# Altium PCB MICROPRESSURE.PcbDoc (part 2 of 2)
Units mm, origin at the board's own origin, x right, y up, seen from the top; angles counter-clockwise.
Board outline 57.02 x 83.19 mm, 2 copper layers (Top Layer, Bottom Layer); 104 components, 45 nets, 269 pads, 428 vias.
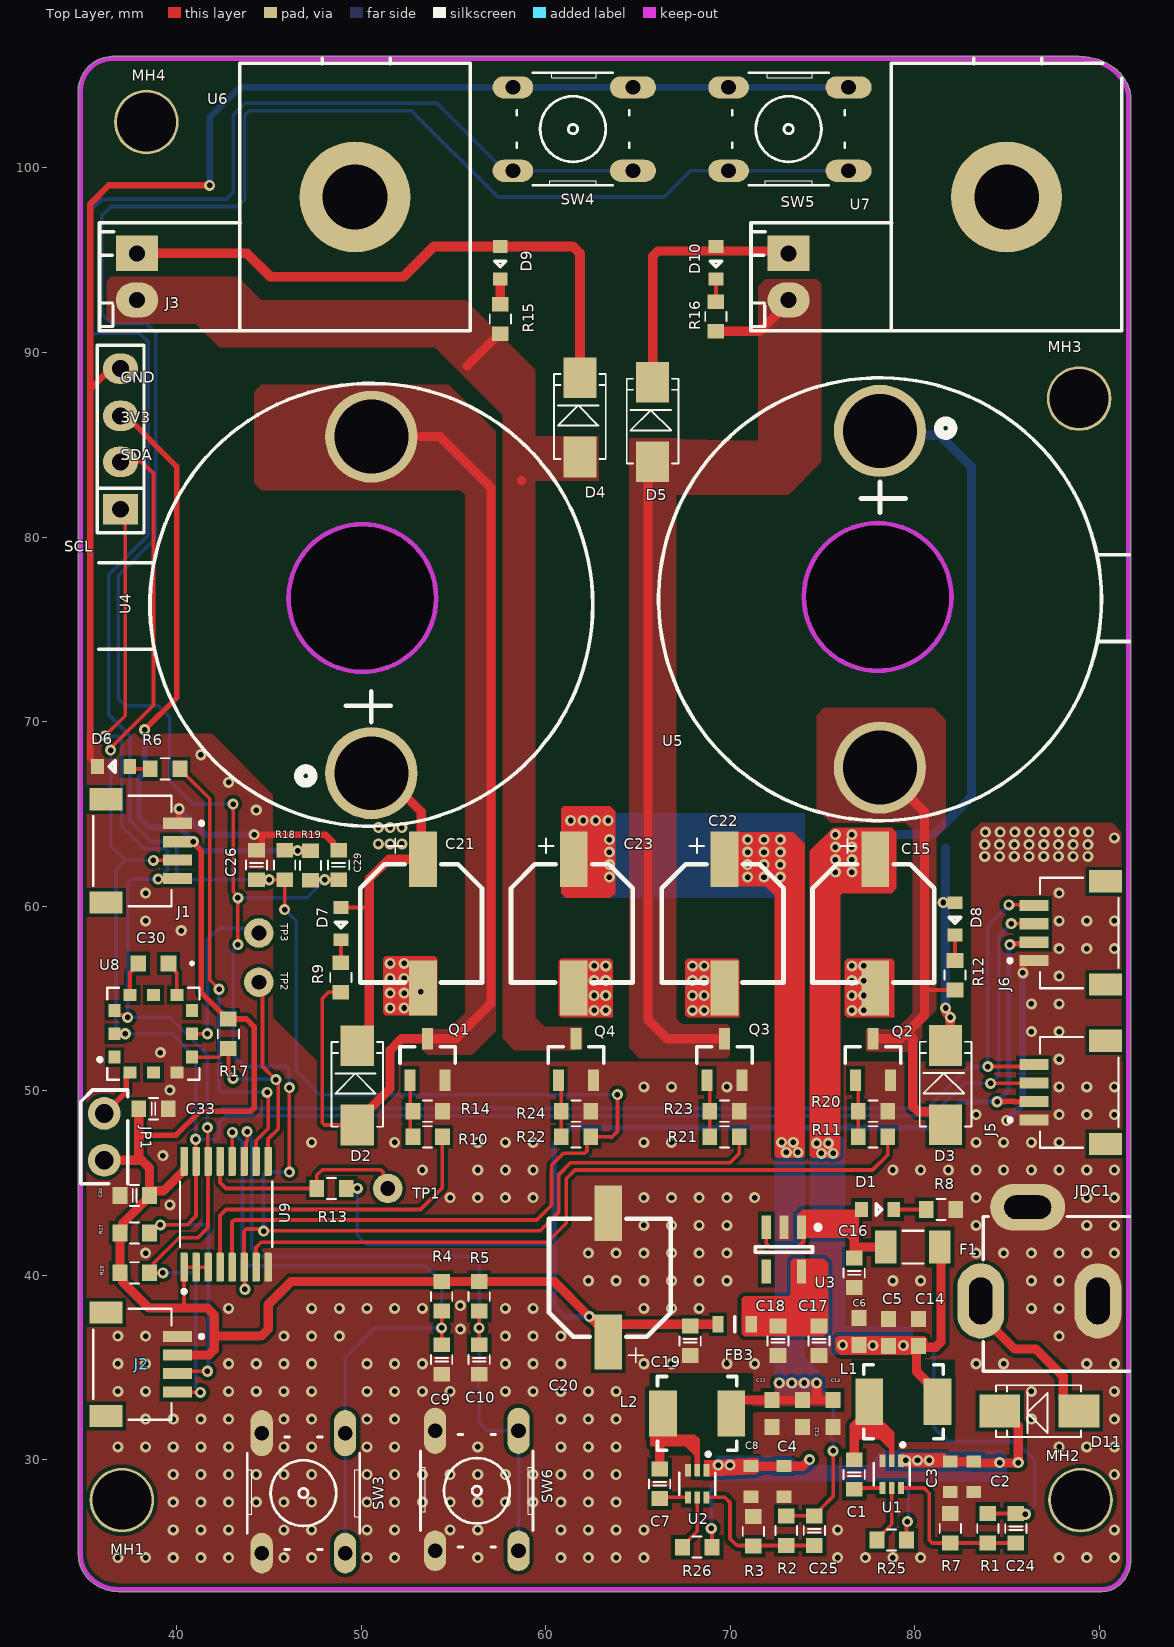
[diagram p0: Top Layer view]

## Via types
v1: diameter 0.6, hole 0.3, Top Layer to Bottom Layer, tented both sides, 428 vias

## Nets (pads, with @x,y where several pads share a name; then routed paths per layer and width w, separated by ;. In a path a pad name is that pad's centre, name@x,y a point inside that pad or via, vN(x,y) a via of type N, cw(c..) or ccw(c..) an arc to the next point about the centre after c; other vN are vias at no path point) (continued)
SW1: (continued)
  Bottom Layer w0.2: v1(43.016,47.747) 43.016,47.737 43.561,47.192 43.561,40.884 43.932,40.513 53.467,40.513 54.356,39.624 v1(54.356,37.148) 50.736,37.148 49.124,35.535 SW3.1 SW3.2
SW2: C10.2 R5.1 SW6.1 SW6.2 U9.11 | length 40.1
  Top Layer w0.2: U9.11 43.752,46.282 43.752,47.216 43.815,47.279 v1(43.815,47.787) ; C10.2 v1(56.388,37.148) R5.1
  Bottom Layer w0.2: v1(43.815,47.787) 43.815,47.679 44.069,47.425 44.069,41.402 44.45,41.021 56.007,41.021 56.388,40.64 v1(56.388,37.148) 56.388,32.004 56.82,31.572 SW6.1 SW6.2
VIN: C2.2 C3.2 C4.2 C8.2 D11.2 R25.2 R26.2 U1.1 U2.1 | length 29
  Top Layer w0.2: v1(68.961,26.289) 68.999,26.251 R26.2 ; R25.2 79.54,26.632 79.502,26.67 79.568,26.67 v1(79.584,26.653)
  Top Layer w0.5: v1(69.977,29.718) 70.004,29.718 70.042,29.756 C8.2@71.12,29.756 ; C8.2 72.699,29.657 72.748,29.706 C4.2@72.898,29.706 ; C4.2 73.915,29.657 74.268,30.01 v1(74.295,30.01) ; v1@80.799,29.972 81.28,29.972 81.349,29.903 81.641,29.903 81.655,29.917 81.671,29.9 82.931,29.9 83.006,29.826 v1@84.563,29.826 ; v1(84.582,29.845) v1@84.563,29.826 ; D11.2 84.793,32.639 85.598,31.834 v1(85.598,29.845) 85.579,29.826 v1@84.563,29.826
  Bottom Layer w0.2: v1(68.961,26.289) 68.961,28.575 69.469,29.083 69.622,29.083 69.942,29.403 69.942,29.683 v1(69.977,29.718) ; 77.47,29.21 78.359,30.099 78.813,30.099 78.902,30.01 79.464,30.01 79.506,29.968 79.51,29.972 v1(80.137,29.972) v1(80.772,29.972) 80.835,29.909 84.519,29.909 v1(84.582,29.845) ; v1(79.584,26.653) 79.629,26.698 79.629,29.21
  other v1: 69.342,29.718 79.502,29.972
pads on no net: J1.S1 J1.S2 J2.S1 J2.S2 J5.S1 J5.S2 J6.S1 J6.S2 MH1.1 MH2.1 MH3.1 MH4.1 U3.4 U6.3 U7.3 U8.1 U8.5 U8.7 U8.11

## Polygon pours and split planes (outlines as drawn)
GND on Bottom Layer "GND_L02_P000" (solid, remove dead copper, pour order 0): 90.297,0.254 91.567,1.524 91.567,57.404 46.101,57.404 45.339,58.166 45.339,66.04 42.164,69.215 30.988,69.215 30.988,1.524 32.131,0.381 33.528,0.381
6V on Bottom Layer "6V_L02_P048" (solid, pour order 48): 70.104,93.853 70.485,94.234 75.057,94.234 75.311,94.488 75.311,96.774 75.057,97.028 68.199,97.028 67.691,96.52 67.691,94.234
6V on Bottom Layer "6V_L02_P046" (solid, pour order 46): 42.037,91.821 41.783,92.075 41.783,94.107 41.656,94.234 36.703,94.234 36.49,94.447 36.49,96.942 36.576,97.028 42.926,97.028 43.307,96.647 43.307,94.742 43.688,94.361 45.72,94.361 45.72,91.948 45.593,91.821
6V on Bottom Layer "6V_L02_P045" (solid, pour order 45): 67.691,91.313 67.691,64.643 67.945,64.389 68.072,64.516 70.104,64.516 70.104,93.853 69.469,94.488 67.691,94.488
6V on Bottom Layer "6V_L02_P044" (solid, pour order 44): 61.468,60.579 57.15,60.579 56.515,61.214 56.515,91.186 55.88,91.821 45.212,91.821 44.958,92.075 44.958,93.98 45.339,94.361 57.531,94.361 58.42,93.472 58.42,65.405 58.928,64.897 61.468,64.897
4V5 on Bottom Layer "4V5_L02_P041" (solid, pour order 41): 74.676,61.849 74.676,60.071 74.422,59.817 55.372,59.817 54.864,60.325 54.864,69.596 54.102,70.358 46.736,70.358 46.228,69.85 46.228,65.024 46.609,64.643 50.165,64.643 50.546,64.262 50.546,59.055 51.562,58.039 77.089,58.039 79.629,60.579 79.629,61.436
4V5 on Bottom Layer "4V5_L02_P040" (solid, pour order 40): 74.676,61.849 74.676,61.214 74.93,60.96 81.534,60.96 82.526,61.952 82.526,64.238 84.709,66.421 84.709,86.995 83.185,88.519 75.311,88.519 75.057,88.265 75.057,83.312 75.565,82.804 81.28,82.804 82.423,81.661 82.423,66.167 80.899,64.643 74.986,64.643 74.709,64.365
GND on Bottom Layer "GND_L02_P035" (solid, pour order 35): 82.169,57.15 82.169,63.627 83.312,64.77 90.424,64.77 91.313,63.881 91.313,57.023
4V5 on Bottom Layer "4V5_L02_P032" (solid, pour order 32): 51.435,65.405 50.927,64.897 50.927,59.055 81.915,59.055 81.915,64.008 74.93,64.008 74.93,59.309 58.42,59.309 57.912,59.817 57.912,64.643 57.15,65.405 55.118,65.405
GND on Top Layer "GND_L01_P001" (solid, remove dead copper, pour order 1): 90.28,0.253 91.55,1.523 91.55,51.562 47.625,51.562 45.212,53.975 45.212,66.04 41.91,69.342 30.971,69.342 30.971,1.523 32.114,0.38 33.511,0.38
6V on Top Layer "6V_L01_P053" (solid, pour order 53): 70.866,31.242 70.866,32.893 75.311,32.893 75.946,32.893 75.946,33.655 75.143,34.417 71.737,34.417 71.102,33.782 69.215,33.782 69.215,31.242
GND on Top Layer "GND_L01_P036" (solid, pour order 36): 82.677,50.8 83.058,51.181 83.058,64.008 83.566,64.516 90.678,64.516 91.186,64.008 91.186,51.193
NetD4_1 on Top Layer "NETD4_1_L01_P055" (solid, pour order 55): 62.865,85.471 58.547,85.471 58.547,83.312 58.674,83.058 62.865,83.058
NetD5_1 on Top Layer "NETD5_1_L01_P050" (solid, pour order 50): 64.516,85.344 71.501,85.217 71.501,93.599 71.882,93.98 74.676,93.98 74.93,93.726 74.93,84.074 73.152,82.296 64.516,82.296
NetD4_1 on Top Layer "NETD4_1_L01_P047" (solid, pour order 47): 44.577,90.297 42.291,90.297 41.402,91.186 41.021,91.567 36.449,91.567 36.195,91.821 36.195,93.853 36.449,94.107 43.307,94.107 44.577,92.837
NetD5_1 on Top Layer "NETD5_1_L01_P042" (solid, pour order 42): 69.977,53.467 69.977,51.943 69.723,51.689 65.151,51.689 64.516,52.324 64.516,84.328 64.516,85.344 67.056,85.344 67.056,84.201 67.056,53.908 67.358,53.606 69.838,53.606
NetD3_1 on Top Layer "NETD3_1_L01_P039" (solid, pour order 39): 77.343,53.34 78.994,53.34 79.883,54.229 79.883,64.135 79.502,64.516 75.438,64.516 74.676,65.278 74.676,70.358 75.057,70.739 81.026,70.739 81.661,70.104 81.661,64.262 81.153,63.754 81.153,54.356 80.391,53.594 80.391,52.881 79.619,52.109 77.431,52.109 77.343,52.197
NetD4_1 on Top Layer "NETD4_1_L01_P038" (solid, pour order 38): 61.722,52.324 61.595,52.197 58.293,52.197 57.658,52.832 57.658,86.614 53.975,90.297 44.069,90.297 44.069,92.837 55.665,92.837 59.436,89.066 59.436,53.975 59.944,53.467 61.976,53.467 61.976,52.269 61.927,52.22
NetD2_1 on Top Layer "NETD2_1_L01_P037" (solid, pour order 37): 53.594,52.814 53.34,52.56 53.34,52.197 53.594,51.943 56.007,51.943 57.277,53.213 57.277,85.725 54.737,88.265 44.577,88.265 44.196,87.884 44.196,82.931 44.577,82.55 55.372,82.55 55.626,82.296 55.626,54.229 54.737,53.34 53.721,53.34

## Keep-outs
Keep-Out Layer:
  circle w0.254: c50.057,76.694 r4
  circle w0.254: c77.978,76.758 r4
  lines w0.254: 34.798,25.146 34.798,104.394 ; 34.798,25.273 34.798,24.848 ccw(c36.532,24.848) 35.306,23.622 ccw(c36.839,25.155) 36.839,22.987 37.465,22.987 89.281,22.987 90.139,22.987 ccw(c90.139,24.288) 91.059,23.368 ccw(c89.833,24.594) 91.567,24.594 91.567,25.273 91.567,103.759 ccw(c89.833,103.759) 91.059,104.985 ; 34.798,104.184 cw(c36.532,104.184) 35.306,105.41 cw(c36.523,104.193) 36.523,105.914 ; 36.523,105.918 88.9,105.918 ; 88.913,105.918 cw(c88.913,102.883) 91.059,105.029

## Other copper
Top Layer:
  pour cut-out: 71.218,32.777 74.959,32.777 74.959,32.604 71.355,32.604 71.218,32.466
  region net VIN: 68.58,29.083 71.374,29.21 71.501,29.337 71.501,30.099 68.58,29.972
  region net 4V5A: 73.66,42.037 76.327,42.037 76.581,41.783 76.708,41.91 76.708,43.561 73.914,43.561 73.66,43.307
  region net 3V3: 73.406,40.894 73.279,40.767 73.279,38.989 73.152,38.862 70.739,38.862 70.612,38.735 70.612,36.83 70.739,36.703 75.057,36.703 75.311,36.957 75.311,40.64 75.057,40.894
  region net VIN: 79.121,29.718 79.248,29.591 81.534,29.591 81.661,29.718 81.661,30.353 79.248,30.353 79.121,30.226
  region net NetC1_1: 78.613,29.718 78.613,30.607 78.105,31.115 76.835,31.115 76.835,32.004 78.359,32.004 78.867,31.496 78.867,30.099
  region net NetC7_1: 68.072,29.21 68.072,30.226 67.564,30.734 65.659,30.734 65.659,31.496 65.786,31.369 68.072,31.369 68.326,31.115 68.326,29.664
  region net 4V5: 74.422,46.355 75.819,46.355 75.946,46.482 75.946,60.579 76.073,60.706 78.74,60.706 78.994,60.96 78.994,64.008 78.74,64.262 75.565,64.262 74.295,62.992 74.295,46.482
  region net GND: 78.867,53.975 76.327,53.975 76.2,54.102 76.2,57.023 76.327,57.15 78.74,57.15 78.867,57.023 78.867,56.896
  region net GND: 70.485,53.975 67.691,53.975 67.564,54.102 67.564,57.023 67.691,57.15 70.358,57.15 70.485,57.023 70.485,56.896
  region net GND: 63.627,53.975 60.833,53.975 60.706,54.102 60.706,57.023 60.833,57.15 63.5,57.15 63.627,57.023 63.627,56.896
  region net GND: 54.102,54.102 51.308,54.102 51.181,54.229 51.181,57.15 51.308,57.277 53.975,57.277 54.102,57.15 54.102,57.023
  region net 4V5: 80.01,35.687 75.946,35.687 75.692,35.941 75.692,36.576 75.819,36.703 80.518,36.703 80.653,36.568 80.653,36.097
  pour cut-out: 65.63,34.689 65.63,30.244 71.218,30.244 71.218,34.689
  region net 6V: 71.755,61.214 72.39,60.579 72.39,46.482 72.517,46.355 73.914,46.355 74.041,46.482 74.041,63.373 73.406,64.008 72.771,64.008 72.263,63.5
  region net 6V: 69.977,61.087 72.898,61.087 73.152,61.341 73.152,63.754 72.898,64.008 70.231,64.008
  region net 6V: 60.833,60.706 61.087,60.452 63.5,60.452 63.754,60.706 63.754,65.151 63.5,65.405 60.96,65.405 60.833,65.278 60.833,63.373
  pour cut-out: 76.581,35.433 76.581,30.988 82.169,30.988 82.169,35.433
Bottom Layer:
  region net VIN: 84.709,30.48 78.232,30.48 77.47,29.718 73.787,29.718 73.279,30.226 69.342,30.226 69.215,30.099 69.215,28.956 69.342,28.829 84.836,28.829 84.963,28.956 84.963,30.226
  region net 4V5: 74.422,47.498 74.295,47.371 74.295,36.449 75.057,35.687 79.629,35.687 79.883,35.941 79.883,37.084 79.756,37.211 76.327,37.211 76.2,37.338 76.2,47.371 76.073,47.498
  region net 6V: 72.517,47.498 72.39,47.371 72.39,33.274 72.644,33.02 75.057,33.02 75.184,33.147 75.184,34.417 74.041,35.56 74.041,47.244 73.787,47.498
  region net 6V: 60.91,60.452 74.041,60.452 74.041,65.024 60.91,65.024

## Silkscreen, mask and mechanical layers (free items; w line width, h text height)
Top Overlay:
  text "GND" at 36.957,88.138 h1
  text "3V3" at 36.957,85.979 h1
  text "SDA" at 36.957,83.947 h1
  text "SCL" at 33.909,78.994 h1

## Text inside footprints (layer, text, board x,y; h text height)
SW3: Top Assembly "1" at 48.515,32.515 h0.6 r270; Top Assembly "2" at 48.389,24.633 h0.6 r270; Top Assembly "3" at 44.067,32.77 h0.6 r270; Top Assembly "4" at 44.066,24.635 h0.6 r270
SW4: Top Assembly "1" at 65.789,100.456 h0.6 r180; Top Assembly "2" at 57.907,100.582 h0.6 r180; Top Assembly "3" at 66.044,104.904 h0.6 r180; Top Assembly "4" at 57.909,104.905 h0.6 r180
SW5: Top Assembly "4" at 69.593,104.905 h0.6 r180; Top Assembly "3" at 77.728,104.904 h0.6 r180; Top Assembly "2" at 69.591,100.582 h0.6 r180; Top Assembly "1" at 77.473,100.456 h0.6 r180
SW6: Top Assembly "4" at 53.464,24.762 h0.6 r270; Top Assembly "3" at 53.465,32.897 h0.6 r270; Top Assembly "2" at 57.787,24.76 h0.6 r270; Top Assembly "1" at 57.913,32.642 h0.6 r270